# Altium PCB PCB layout.PcbDoc
Units mil, origin at the board's own origin, x right, y up, seen from the top; angles counter-clockwise.
Board outline 3585 x 2745 mil, 2 copper layers (Top Layer, Bottom Layer); 39 components, 47 nets, 172 pads, 4 vias.
Unrouted connection lines stored in the file: 1.
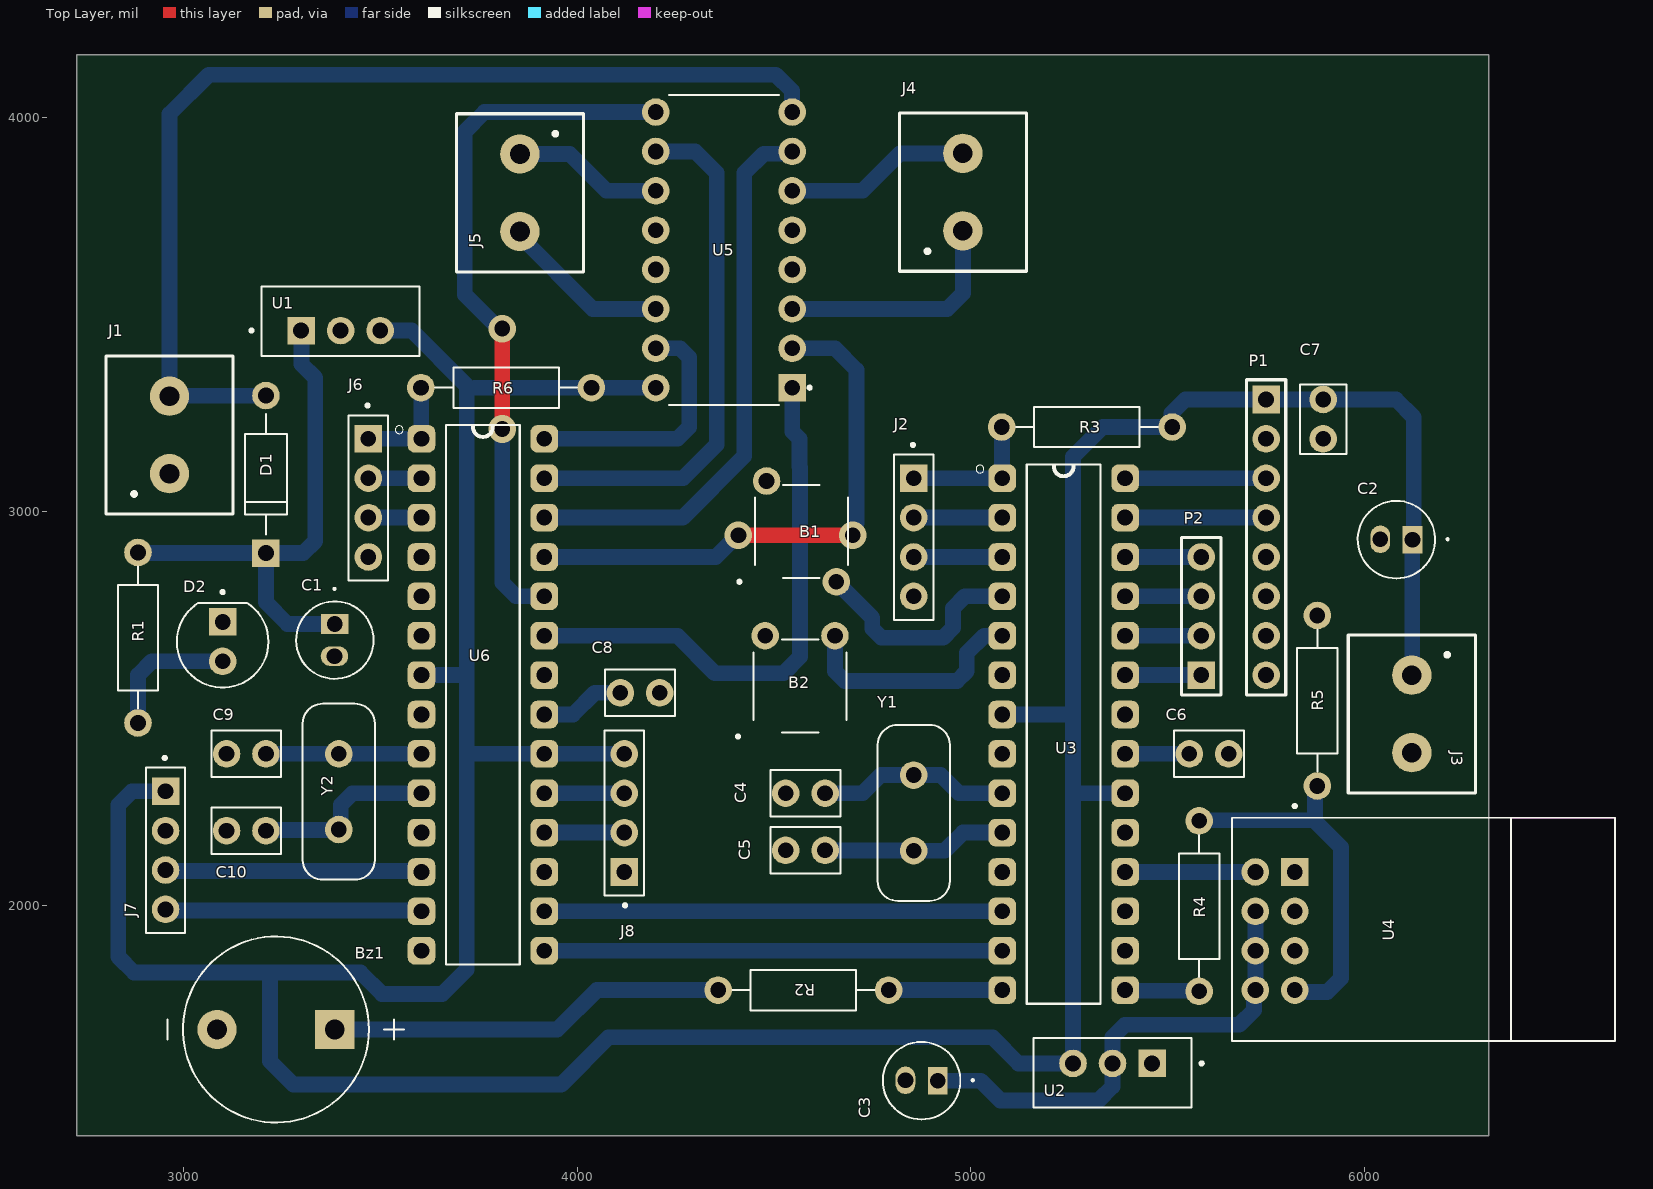
[diagram p0: Top Layer view]
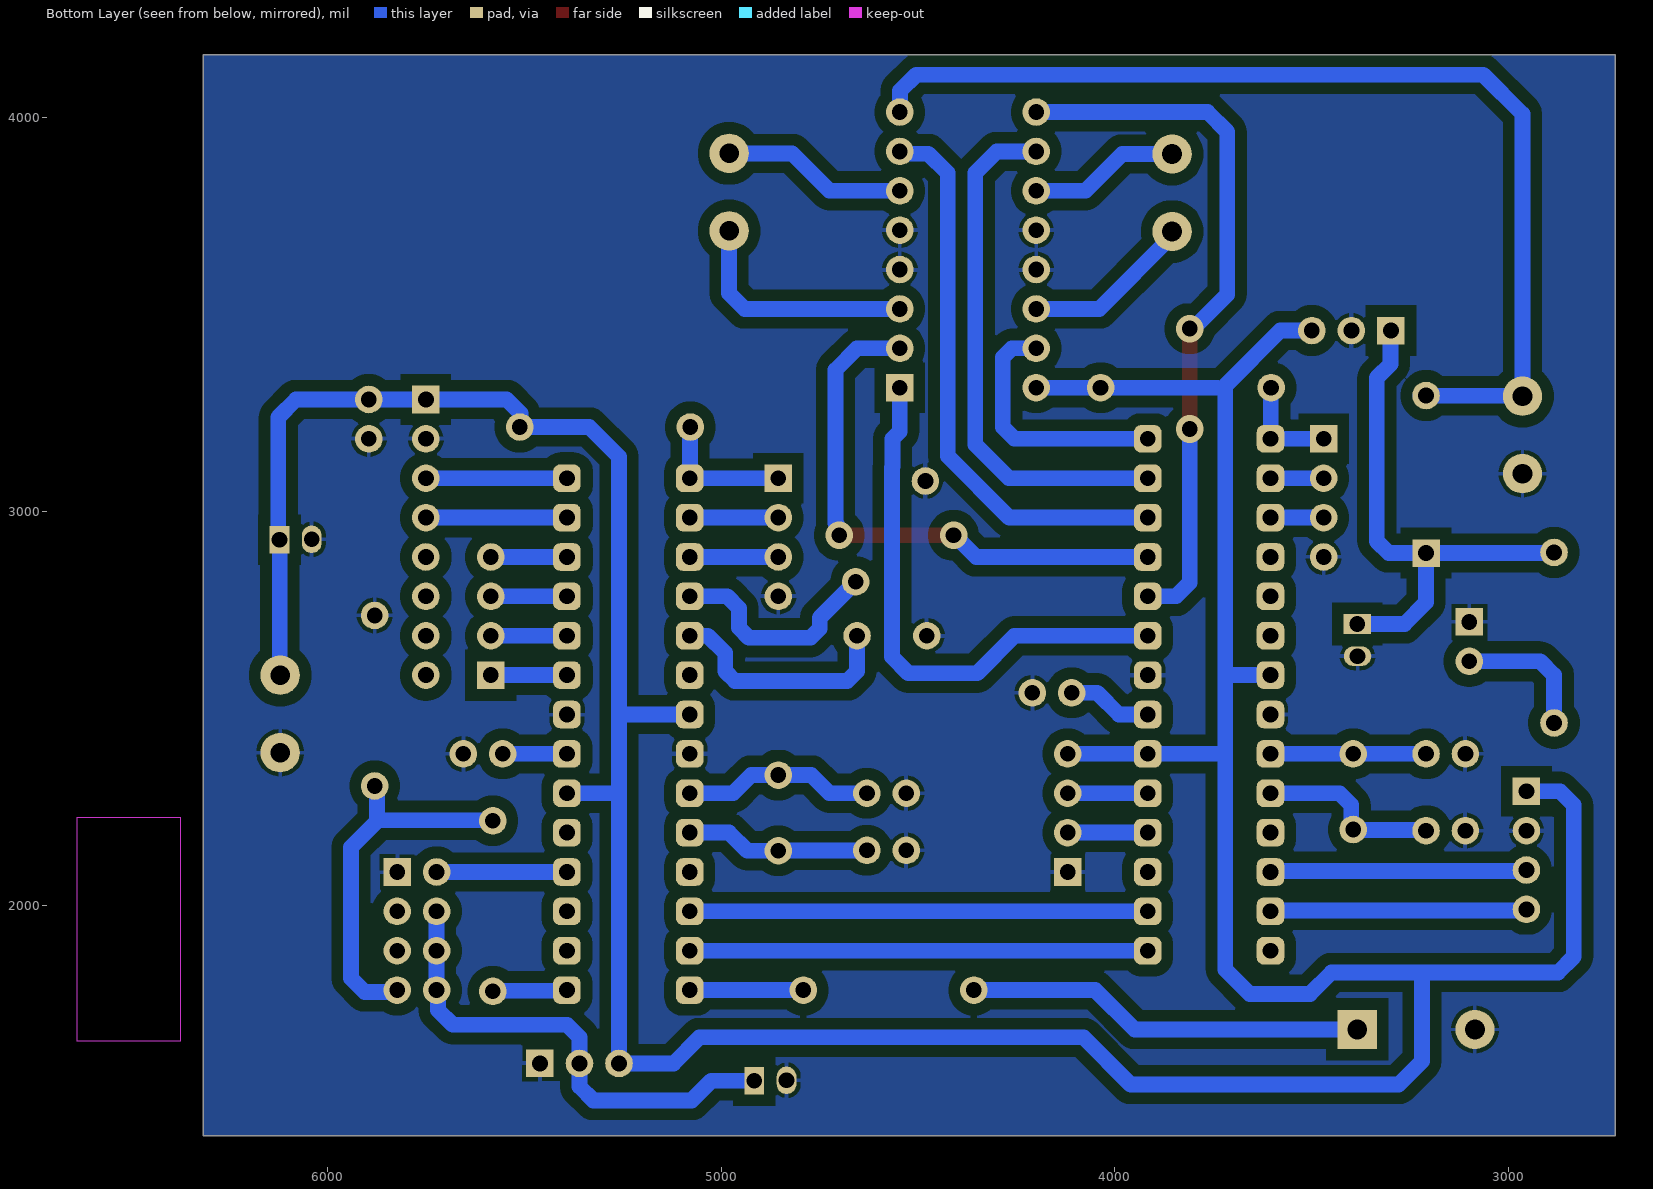
[diagram p1: Bottom Layer view, seen from below]
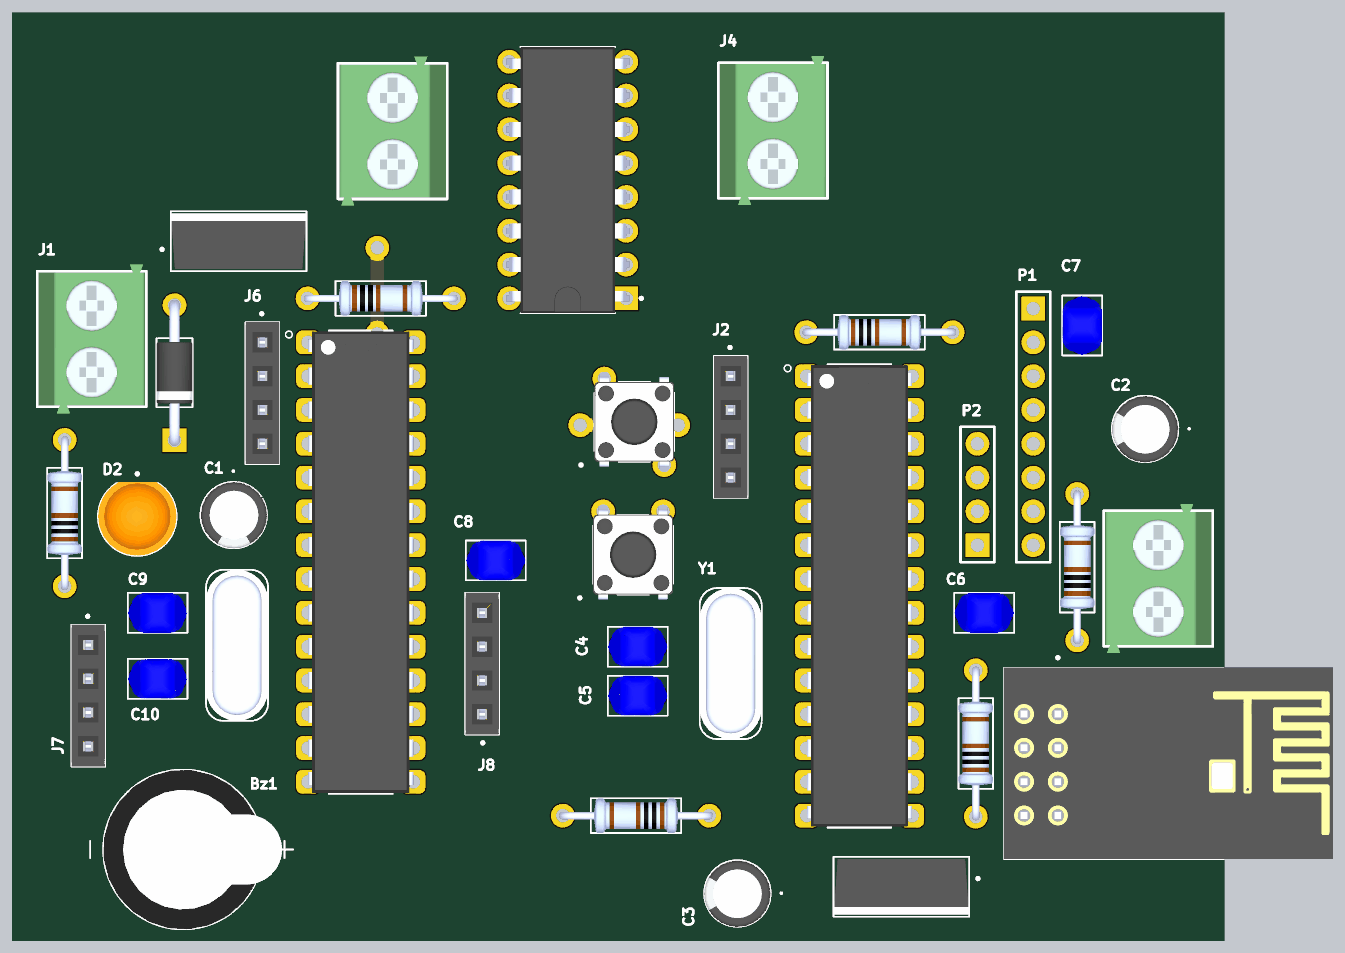
[diagram p2: 3D render of the assembled board from above, using the file's embedded part models]

## Layer stack, top to bottom
Top Solder: solder mask 0.4, Solder Resist, Dk 3.5
Top Layer: signal copper 1.4
Dielectric 1: dielectric 12.6, FR-4, Dk 4.8
Bottom Layer: signal copper 1.4
Bottom Solder: solder mask 0.4, Solder Resist, Dk 3.5

## Board outline
2730,1415 6315,1415 6315,4160 2730,4160

## Design rules (kind name [scope] priority, off if disabled: settings)
Clearance [All] p1: gap=30 ignorepadtopadclearanceinfootprint=FALSE
PolygonConnect [All] p1: connectstyle=Relief reliefconductorwidth=10 reliefentries=4 polygonreliefangle="90 Angle" airgapwidth=10
RoutingVias [All] p1: holewidth=40 width=70 viastyle="Through Hole" minholewidth=40 minwidth=70 maxholewidth=40 maxwidth=70
SolderMaskExpansion [All] p1: expansion=4 istentingtop=FALSE
Width [All] p1: maxlimit=60 minlimit=40 preferedwidth=50
30 further rules are at their usual default settings.

## Classes and differential pairs
component class "schematic sheet2": C7 C8 C9 C10 J3 J4 J5 J6 J7 J8 R6 U5 U6 Y2
component class "schematic sheet1": B1 B2 Bz1 C1 C2 C3 C4 C5 C6 D1 D2 J1 J2 P1 P2 R1 R2 R3 R4 R5 U1 U2 U3 U4 Y1

## Components (designator, comment, footprint, x,y, rotation, side; value= is the part's Value field where it differs from the comment)
B1 "Push button" SW_TS02-66-95-BK-260-LCR-D#1 4570,2950 r90 top
B2 "Push button" SW_TS02-66-95-BK-260-LCR-D#2 4566.42,2557.05 r90 top
Bz1 "AI-1223-TWT-12V-R" XDCR_AI-1223-TWT-12V-R 3235.39,1685 r270 top
C1 "100uF" CAPPRD500W50D500H1100 3385,2674 r270 top
C2 "10uF" CAPPRD500W50D500H1100 6081,2929 r180 top
C3 "10uF" CAPPRD500W50D500H1100 4875,1555 r180 top
C4 "22pF" CAPRB500W50L450T300H550 4630,2285 r180 top
C5 "22pF" CAPRB500W50L450T300H550 4630,2140 r180 top
C6 "100nF" CAPRB500W50L450T300H550 5555,2385 r0 top
C7 "100nF" CAPRB500W50L450T300H550 5895,3185 r90 top
C8 "100nF" CAPRB500W50L450T300H550 4110,2540 r0 top
C9 "22pF" CAPRB500W50L450T300H550 3210,2385 r180 top
C10 "22pF" CAPRB500W50L450T300H550 3210,2190 r180 top
D1 "1N4007" DIOAD1060W80L520D270 3210,3095 r90 top
D2 "L08R5000Q1" LEDRD254W57D500H1070 3100,2670 r270 top
J1 "TBlock 2" 691111710002 2965,3195 r90 top
J2 "Header 4" SULLINS_PPTC041LFBN-RC 4855,2935 r270 top
J3 "TBlock 2" 691111710002 6120,2486.57 r270 top
J4 "691111710002" 691111710002 4980,3811.57 r90 top
J5 "691111710002" 691111710002 3855,3810 r270 top
J6 "Header 4" SULLINS_PPTC041LFBN-RC 3470,3035 r270 top
J7 "Header 4" SULLINS_PPTC041LFBN-RC 2955,2140 r270 top
J8 "Header 4" SULLINS_PPTC041LFBN-RC 4120,2235 r90 top
P1 "Header 8" HDR1X8 5750,3285 r270 top
P2 "Header 4" HDR1X4 5585,2585 r90 top
R1 "1k" RESAD1100W55L680D260 2885,2680 r270 top
R2 "100" RESAD1100W55L680D260 4575,1785 r0 top
R3 "10k" RESAD1100W55L680D260 5295,3215 r180 top
R4 "1k1" RESAD1100W55L680D260 5580,1998.46 r270 top
R5 "2.2k" RESAD1100W55L680D260 5880,2520 r270 top
R6 "10k" RESAD1100W55L680D260 3820,3315 r180 top
U1 "LM7805" TO255P1020X450X1968-3 3399.61,3483.82 r0 top
U2 "LD1117V33" TO255P1020X450X1968-3 5360,1575 r180 top
U3 "ATMEGA328P-PU" DIP794W46P254L2967H457Q28B 5235.91,2435 r0 top
U4 "ESP8266-01/ESP-01" XCVR_ESP8266-01/ESP-01 6150,1935 r270 top
U5 "L293D" DIP880W50P254L2000H510Q16 4373.23,3665 r180 top
U6 "ATMEGA328P-PU" DIP794W46P254L2967H457Q28B 3760.91,2535 r0 top
Y1 "16MHz" XTAL_ECS-160-20-4X 4855,2235 r270 top
Y2 "16MHz" XTAL_ECS-160-20-4X 3395,2288.94 r270 top

## Footprints (in the part's own frame and the unit in brackets; to place one, negate y for a bottom-side part, rotate by r counter-clockwise, add the part's x,y. Pads: shape width x height; smd on the part's side, far side on the other; paste and mask are expansions set on the pad)
691111710002 [mm]
  round 2.54 hole 1.27: 1(-2.5,0) 2(2.5,0)
  silkscreen extent -5.1,-4.1 5.1,4.1, body extent -5.6,-4 5.6,4, height 11.01
CAPPRD500W50D500H1100 [mil]
  oval 50x70 hole 40: N(41,-1)
  rect 50x70 hole 40: P(-41,0)
  silkscreen extent -131,-98 98,98, body extent -108,-97 108,99, height 434
CAPRB500W50L450T300H550 [mil]
  round 70 hole 40: 1(0,0) 2(100,0)
  silkscreen extent -39,-59 139,59, body extent -38,-59 138,59, height 210
DIOAD1060W80L520D270 [mil]
  round 70 hole 40: A(200,0)
  rect 70x70 hole 40: C(-200,0)
  silkscreen extent -154,-53 154,53, body extent -216,-53 216,53, height 99
DIP794W46P254L2967H457Q28B [mil]
  rrect50% 70x70 hole 40: 1(-155.91,650) 2(-155.91,550) 3(-155.91,450) 4(-155.91,350) 5(-155.91,250) 6(-155.91,150) 7(-155.91,50) 8(-155.91,-50) 9(-155.91,-150) 10(-155.91,-250) 11(-155.91,-350) 12(-155.91,-450) 13(-155.91,-550) 14(-155.91,-650) 15(155.91,-650) 16(155.91,-550) 17(155.91,-450) 18(155.91,-350) 19(155.91,-250) 20(155.91,-150) 21(155.91,-50) 22(155.91,50) 23(155.91,150) 24(155.91,250) 25(155.91,350) 26(155.91,450) 27(155.91,550) 28(155.91,650)
  silkscreen extent -223,-685 94,685, body extent -156,-682 156,683, height 180
DIP880W50P254L2000H510Q16 [mil]
  rect 70x70 hole 40: 1(-173.23,350)
  round 70 hole 40: 2(-173.23,250) 3(-173.23,150) 4(-173.23,50) 5(-173.23,-50) 6(-173.23,-150) 7(-173.23,-250) 8(-173.23,-350) 9(173.23,-350) 10(173.23,-250) 11(173.23,-150) 12(173.23,-50) 13(173.23,50) 14(173.23,150) 15(173.23,250) 16(173.23,350)
  silkscreen extent -221,-394 140,394, body extent -182,-394 182,394, height 201
HDR1X4 [mil] "Connector; Header; 4 Position"
  rect 70x70 hole 40: 1(0,0)
  round 70 hole 40: 2(100,0) 3(200,0) 4(300,0)
  silkscreen extent -50,-50 350,50
HDR1X8 [mil] "Connector; Header; 8 Position"
  rect 70x70 hole 40: 1(0,0)
  round 70 hole 40: 2(100,0) 3(200,0) 4(300,0) 5(400,0) 6(500,0) 7(600,0) 8(700,0)
  silkscreen extent -50,-50 750,50
LEDRD254W57D500H1070 [mil]
  round 70 hole 40: A(50,0)
  rect 70x70 hole 40: C(-50,0)
  silkscreen extent -130,-116 116,116, body extent -102,-116 116,116, height 358
RESAD1100W55L680D260 [mil]
  round 70 hole 40: 1(-216.54,0) 2(216.54,0)
  silkscreen extent -180,-51 180,51, body extent -227,-51 227,51, height 101
SULLINS_PPTC041LFBN-RC [mil]
  rect 70x70 hole 40: 1(-150,0)
  round 70 hole 40: 2(-50,0) 3(50,0) 4(150,0)
  silkscreen extent -239,-50 210,50, body extent -210,-50 210,50, height 335
SW_TS02-66-95-BK-260-LCR-D#1 [mm]
  rect 0x0 all layers, no hole: 1(-3.25,2.25)
  round 1.778 hole 1.016: 2(3.25,2.25) 3(-3.25,-2.25)
  round 0 all layers, no hole: 4(3.25,-2.25)
  silkscreen extent -3.35,-3 3,4.1, body extent -3.95,-3 3.94,3, height 9.7
SW_TS02-66-95-BK-260-LCR-D#2 [mm]
  rect 0x0 all layers, no hole: 1(-3.25,2.25)
  round 1.778 hole 1.016: 2(3.25,2.25) 4(3.25,-2.25)
  round 0 all layers, no hole: 3(-3.25,-2.25)
  silkscreen extent -3.35,-3 3,4.1, body extent -3.95,-3 3.94,3, height 9.7
TO255P1020X450X1968-3 [mil]
  rect 70x70 hole 40: 1(-100.39,-23.82)
  round 70 hole 40: 2(0,-23.82) 3(100.39,-23.82)
  silkscreen extent -230,-89 201,89, body extent -200,-82 200,83, height 901
XCVR_ESP8266-01/ESP-01 [mil]
  rect 70x70 hole 40: 1(-150,-327.17)
  round 70 hole 40: 2(-50,-327.17) 3(50,-327.17) 4(150,-327.17) 5(-150,-427.17) 6(-50,-427.17) 7(50,-427.17) 8(150,-427.17)
  Keep-Out Layer region: 279.13,222.44 -287.8,222.44 -287.8,486.22 279.13,486.22
  silkscreen extent -321,-486 279,486, body extent -288,-486 278,486, height 256
XDCR_AI-1223-TWT-12V-R [mm]
  round 2.54 hole 1.27: N(0,-3.8)
  rect 2.54x2.54 hole 1.27: P(0,3.8)
  silkscreen extent -6,-6.98 6,8.25, body extent -6,-6 6,7.44, height 9.56
XTAL_ECS-160-20-4X [mil]
  round 70 hole 40: 1(-96.06,0) 2(96.06,0)
  silkscreen extent -223,-92 223,92, body extent -223,-92 223,92, height 138

## Part data
Bz1: library part Buzzer, "ELECTRO-MECHANICAL AUDIO INDICATOR", Package="2225 PUI Audio", Availability="In Stock", MF="PUI Audio,", MP=AI-1223-TWT-12V-R, Price=None, Purchase-URL=https://pricing.snapeda.com/search/part/AI-1223-TWT-12V-R/?ref=eda
C1 C2 C3: library part "Electrolytic capacitor", "FS-A", Package=None, Availability=Unavailable, MF="{'manufacturer': u'Panasonic'}", MP=EEUFS0J221B, Price=None
C4 C5 C6 C7 C8 C9 C10: library part "Ceramic capacitor", "2200 pF Â±10% 250V Ceramic Capacitor X7R Radial", Package="Radial TDK", Check_prices=https://www.snapeda.com/parts/FG24X7R2E222KNT06/TDK/view-part/?ref=eda, Digi-Key_Part_Number=445-173386-1-ND, MF=TDK, MP=FG24X7R2E222KNT06, Purchase-URL=https://pricing.snapeda.com/search/part/FG24X7R2E222KNT06/?ref=eda, SnapEDA_Link=https://www.snapeda.com/parts/FG24X7R2E222KNT06/TDK/view-part/?ref=snap
D1: "Diode Switching 1KV 1A 2-Pin DO-41", Package=None, Availability=Unavailable, MP=1N4007, Price=None
D2: library part LED, "LED, Orange, Through Hole, T-1 3/4 (5mm), 30 mA, 2.1 V, 635 nm", Package=None, Availability=Unavailable, MF="{'manufacturer': u'LED Technology'}", MP=L08R5000Q1, Price=None
J1 J3 J4 J5: library part "Terminal Block - 2Pins", "2 Position Wire to Board Terminal Block Horizontal with Board 0.197 _5.00mm_ Through Hole", Package=None, Availability=Unavailable, MF="Wurth Electronics", MP=691111710002, Price=None, SnapEDA_Link=https://www.snapeda.com/parts/691111710002/Wurth%20Electronics%20Inc./view-part/1195092/?ref=snap
J2 J6 J7 J8: library part "Female header - 4Pins", "4 Position Header Connector Through Hole", Package=None, Availability=Warning, Check_prices=https://www.snapeda.com/parts/PPTC041LFBN-RC/Sullins%20Connector%20Solutions/view-part/285917/?ref=eda, MF="Sullins Connector", MP=PPTC041LFBN-RC, Price=None, Purchase-URL=https://pricing.snapeda.com/search/part/PPTC041LFBN-RC/?ref=eda, SnapEDA_Link=https://www.snapeda.com/parts/PPTC041LFBN-RC/Sullins%20Connector%20Solutions/view-part/285917/?ref=snap
P1: "Header, 8-Pin", LatestRevisionDate=17-Jul-2002, LatestRevisionNote="Re-released for DXP Platform.", Publisher="Altium Limited"
P2: "Header, 4-Pin", LatestRevisionDate=17-Jul-2002, LatestRevisionNote="Re-released for DXP Platform.", Publisher="Altium Limited"
R1 R2 R3 R4 R5 R6: library part "Resistor (0.25W)", "(MFR-25FBF52-10K) 10,2 kOhm bei 1% 0,25W, 1/4W Durchbohrlochwiderstand Axial Metal Film", Package="Axial Yageo", Digi-Key_Part_Number=10.2KXBK-ND, MF=Yageo, MP=MFR-25FBF52-10K, Purchase-URL=https://pricing.snapeda.com/search/part/MFR-25FBF52-10K/?ref=eda, SnapEDA_Link=https://www.snapeda.com/parts/MFR-25FBF52-10K/Yageo/view-part/424333/?ref=snap
U1: library part LM78__, Package=None, Availability=Unavailable, MP=LM7805CT/NOPB, Price=None
U2: Package=None, Availability=Unavailable, MP=LD1117V33, Price=None
U3 U6: "ATmega Series 20 MHz 32 KB Flash 2 KB SRAM 8-Bit Microcontroller - DIP-28", Package=None, Availability=Unavailable, MP=ATMEGA328P-PU, Price=None
U4: library part "ESP8266-01 Module", "MakerFocus 4pcs ESP8266 ESP-01 Serial Wireless WiFi Transceiver Receiver Module 1MB SPI Flash DC3.0-3.6V Internet of Things WiFi Module Board Compatible with Ar duino", Package=None, Availability=Unavailable, MP=ESP8266-01/ESP-01, Price=None
U5: "4-Channel Motor Driver 24V 16-Pin Power PDIP Tube", Package=None, Availability=Unavailable, MP=L293D, Price=None
Y1 Y2: library part "Crystal oscilator", "CRYSTAL T/H", Package=None, Availability=Unavailable, MF="{'manufacturer': u'ECS Inc.'}", MP=ECS-160-S-4, Price=None

## Via types
v1: diameter 70, hole 40, Top Layer to Bottom Layer, 4 vias

## Nets (pads, with @x,y where several pads share a name; then routed paths per layer and width w, separated by ;. In a path a pad name is that pad's centre, name@x,y a point inside that pad or via, vN(x,y) a via of type N, cw(c..) or ccw(c..) an arc to the next point about the centre after c; other vN are vias at no path point)
+3V3: C3.P U2.2 U4.6 U4.7 U4.8 | length 1243.2
  Bottom Layer w40: C3.P 5025,1555 5075,1505 5325,1505 5360,1540 5360,1665 5391.93,1696.93 5681.93,1696.93 5719.24,1734.24 5719.24,1784.24 U4.8@5720,1785 ; U4.8 U4.7 U4.6
Battery: D1.A J1.2 U5.8 | length 2670.8
  Bottom Layer w40: D1.A@3225,3295 D1.A 3209.21,3294.21 2965.79,3294.21 J1.2 2965,4010 3065,4110 4505,4110 4546.05,4068.95 4546.05,4015.4 U5.8
brake: P2.4 U3.26 | length 193.2
  Bottom Layer w40: U3.26 P2.4
bt_rx: J7.4 U6.13 | length 652.1
  Bottom Layer w40: J7.4 2957.5,1987.5 3602.5,1987.5 U6.13
bt_tx: J7.3 U6.12 | length 652.1
  Bottom Layer w40: J7.3 2957.5,2087.5 3602.5,2087.5 U6.12
button1: B1.3 U3.4 | length 569
  Bottom Layer w40: B1.3 4750,2730.63 4750,2703.43 4773.43,2680 4930,2680 4955,2705 4955,2755 4985,2785 U3.4
button2: B2.4 U3.5 | length 599.9
  Bottom Layer w40: B2.4 4655,2595 4680,2570 4965,2570 4990,2595 4990,2641.01 5033.99,2685 U3.5
buzzer: R2.2 U3.14 | length 288.5
  Bottom Layer w40: R2.2 U3.14
esp_rx: R4.2 U3.15 | length 189.5
  Bottom Layer w40: U3.15 5393.35,1783.46 5578.46,1783.46 R4.2
esp_tx: U3.18 U4.5 | length 331
  Bottom Layer w40: U3.18 U4.5
flame: P2.1 U3.23 | length 193.2
  Bottom Layer w40: U3.23 P2.1
GND: B1.2 B2.2 Bz1.N C1.N C2.N C3.N C4.2 C5.2 C6.2 C7.1 C8.2 C9.2 C10.2 D2.C J1.1 J2.4 J3.2 J6.4 J7.2 J8.1 P1.2 R5.1 U1.2 U2.1 U3.8 U3.22 U4.1 U5.4 U5.5 U5.12 U5.13 U6.8 U6.22
gps_rx: J8.3 U6.19 | length 203.2
  Bottom Layer w40: U6.19 J8.3
gps_tx: J8.2 U6.18 | length 203.2
  Bottom Layer w40: U6.18 J8.2
motor_enable1: U5.1 U6.23 | length 1398
  Bottom Layer w40: U6.23 4255,2685 4350,2590 4525,2590 4566.42,2631.42 4566.42,3113.16 4565,3114.58 4565,3185 4546.46,3203.54 U5.1
motor_enable2: U5.9 U6.24 | length 1816.1
  Top Layer w40: v1(3810,3210) v1(3810,3465)
  Bottom Layer w40: v1(3810,3210) 3810,2820 3845,2785 U6.24 ; v1(3810,3465) 3801.88,3465 3715,3551.88 3715,3965 3765,4015 U5.9
motor_pin1: U5.2 U6.25 | length 1416.4
  Top Layer w40: v1(4410,2940) v1(4700,2940)
  Bottom Layer w40: U6.25 4352.29,2885 4407.29,2940 v1(4410,2940) ; U5.2 4655,3415 4710,3360 4710,2971.21 4705.74,2966.95 4705.74,2945.74 v1(4700,2940)
motor_pin2: U5.7 U6.26 | length 1435.6
  Bottom Layer w40: U6.26 4268.26,2985 4425,3141.74 4425,3860 4474.26,3909.26 4540.72,3909.26 U5.7
motor_pin3: U5.10 U6.27 | length 1340.7
  Bottom Layer w40: U6.27 4269.26,3085 4355,3170.74 4355,3860 4300,3915 U5.10
motor_pin4: U5.15 U6.28 | length 651.9
  Bottom Layer w40: U6.28 4255,3185 4285,3215 4285,3391.57 4261.57,3415 U5.15
NetBz1_P: Bz1.P R2.1 | length 1014.9
  Bottom Layer w40: Bz1.P 3950,1685 4050,1785 R2.1
NetC1_P: C1.P D1.C R1.1 U1.1 | length 1333.5
  Bottom Layer w40: R1.1@2886.54,2895 D1.C ; U1.1 3300,3459.21 3300,3375 3335,3340 3335,2925 3305,2895 D1.C ; C1.P 3265,2715 3210,2770 D1.C
NetC6_1: C6.1 U3.21 | length 163.2
  Bottom Layer w40: U3.21 C6.1
NetC8_1: C8.1 U6.21 | length 216
  Bottom Layer w40: U6.21 3990,2485 4045,2540 C8.1
NetD2_A: D2.A R1.2 | length 351
  Bottom Layer w40: R1.2 2885,2585 2920,2620 D2.A
NetJ4_1: J4.1 U5.3 | length 608.3
  Bottom Layer w40: U5.3 4940,3515 4980,3555 J4.1
NetJ4_2: J4.2 U5.6 | length 472.9
  Bottom Layer w40: U5.6 4725,3815 4820,3910 J4.2
NetJ5_1: J5.1 U5.11 | length 383.7
  Bottom Layer w40: J5.1 3981.57,3908.43 4075,3815 U5.11
NetJ5_2: J5.2 U5.14 | length 433.2
  Bottom Layer w40: J5.2 3855,3700 4040,3515 U5.14
NetR4_1: R4.1 R5.2 U4.4 | length 945.6
  Bottom Layer w40: R4.1@5580,2216.54 5871.54,2216.54 ; U4.4 5827.83,1780 5905,1780 5940,1815 5940,2148.07 5871.54,2216.54 ; R5.2 5874.26,2297.72 5874.26,2219.26 5871.54,2216.54
NetU3_12: U3.12 U6.16 | length 1163.2
  Bottom Layer w40: U6.16 U3.12
NetU3_13: U3.13 U6.15 | length 1163.2
  Bottom Layer w40: U6.15 U3.13
reset1: J2.1 R3.2 U3.1 | length 355.6
  Bottom Layer w40: J2.1 U3.1 5079.23,3085.77 5079.23,3214.23 R3.2
reset2: J6.1 R6.2 U6.1 | length 265.6
  Bottom Layer w40: J6.1 U6.1 3604.23,3185.77 3604.23,3314.23 R6.2
rx1: J2.3 U3.3 | length 225
  Bottom Layer w40: J2.3 U3.3
rx2: J6.3 U6.3 | length 135
  Bottom Layer w40: J6.3 U6.3
SCL: P1.3 U3.28 | length 358.2
  Bottom Layer w40: U3.28 P1.3
SDA: P1.4 U3.27 | length 358.2
  Bottom Layer w40: U3.27 P1.4
smoke: P2.2 U3.24 | length 193.2
  Bottom Layer w40: U3.24 P2.2
tx1: J2.2 U3.2 | length 225
  Bottom Layer w40: J2.2 U3.2
tx2: J6.2 U6.2 | length 135
  Bottom Layer w40: J6.2 U6.2
VCC: C2.P C7.2 J3.1 J7.1 J8.4 P1.1 R3.1 R6.1 U1.3 U2.3 U3.7 U3.20 U5.16 U6.7 U6.20 | length 10025.5
  Bottom Layer w40: J7.1 2870,2290 2835,2255 2835,1870 2875,1830 3220,1830 ; U1.3 3580,3460 3720,3320 ; U6.7 3720,2585 ; 3720,3315 3720,2585 ; 3740,2385 U6.20 J8.4 ; 3740,3315 R6.1 U5.16 ; U3.7 5254.61,2485 5259.61,2480 ; U3.20 5259.61,2285 ; J3.1 6121,2586 6121,2928 C2.P 6125,2932 6125,3240 6080,3285 C7.2 P1.1 5545,3285 5510,3250 5510,3216.54 R3.1 5335,3215 5259.61,3139.61 5259.61,2480 ; 3220,1830 3220,1605 3280,1545 3960,1545 4080,1665 5055,1665 5121.18,1598.82 U2.3 5259.61,2285 ; 3220,1830 3450,1830 3505,1775 3657.5,1775 3720,1837.5 3720,2585 ; 5259.61,2285 5259.61,2480
vibration: P2.3 U3.25 | length 193.2
  Bottom Layer w40: U3.25 P2.3
xtal1_1: C4.1 U3.9 Y1.1 | length 488.2
  Bottom Layer w40: C4.1 4725,2285 4771.06,2331.06 Y1.1 4923.94,2331.06 4970,2285 U3.9
xtal1_2: C9.1 U6.9 Y2.1 | length 395
  Bottom Layer w40: C9.1 Y2.1 U6.9
xtal2_1: C5.1 U3.10 Y1.2 | length 469.5
  Bottom Layer w40: C5.1 4630.53,2139.47 4854.47,2139.47 Y1.2 4933.94,2138.94 4980,2185 U3.10
xtal2_2: C10.1 U6.10 Y2.2 | length 467.8
  Bottom Layer w40: C10.1 3211.44,2191.44 3393.56,2191.44 Y2.2 3400,2197.87 3400,2255 3430,2285 U6.10
pads on no net: B1.1 B1.4 B2.1 B2.3 P1.5 P1.6 P1.7 P1.8 U3.6 U3.11 U3.16 U3.17 U3.19 U4.2 U4.3 U6.4 U6.5 U6.6 U6.11 U6.14 U6.17

## Polygon pours and split planes (outlines as drawn)
GND on Bottom Layer "GND_L02_P000" (solid, pour order 0): 2730,4160 2730,1415 6315,1415 6315,4160